# Altium PCB Current_measurement_PCB.PcbDoc
Units mm, origin at the board's own origin, x right, y up, seen from the top; angles counter-clockwise.
Board outline 33.27 x 21.72 mm, 2 copper layers (Top Layer, Bottom Layer); 15 components, 11 nets, 45 pads, 2 vias.
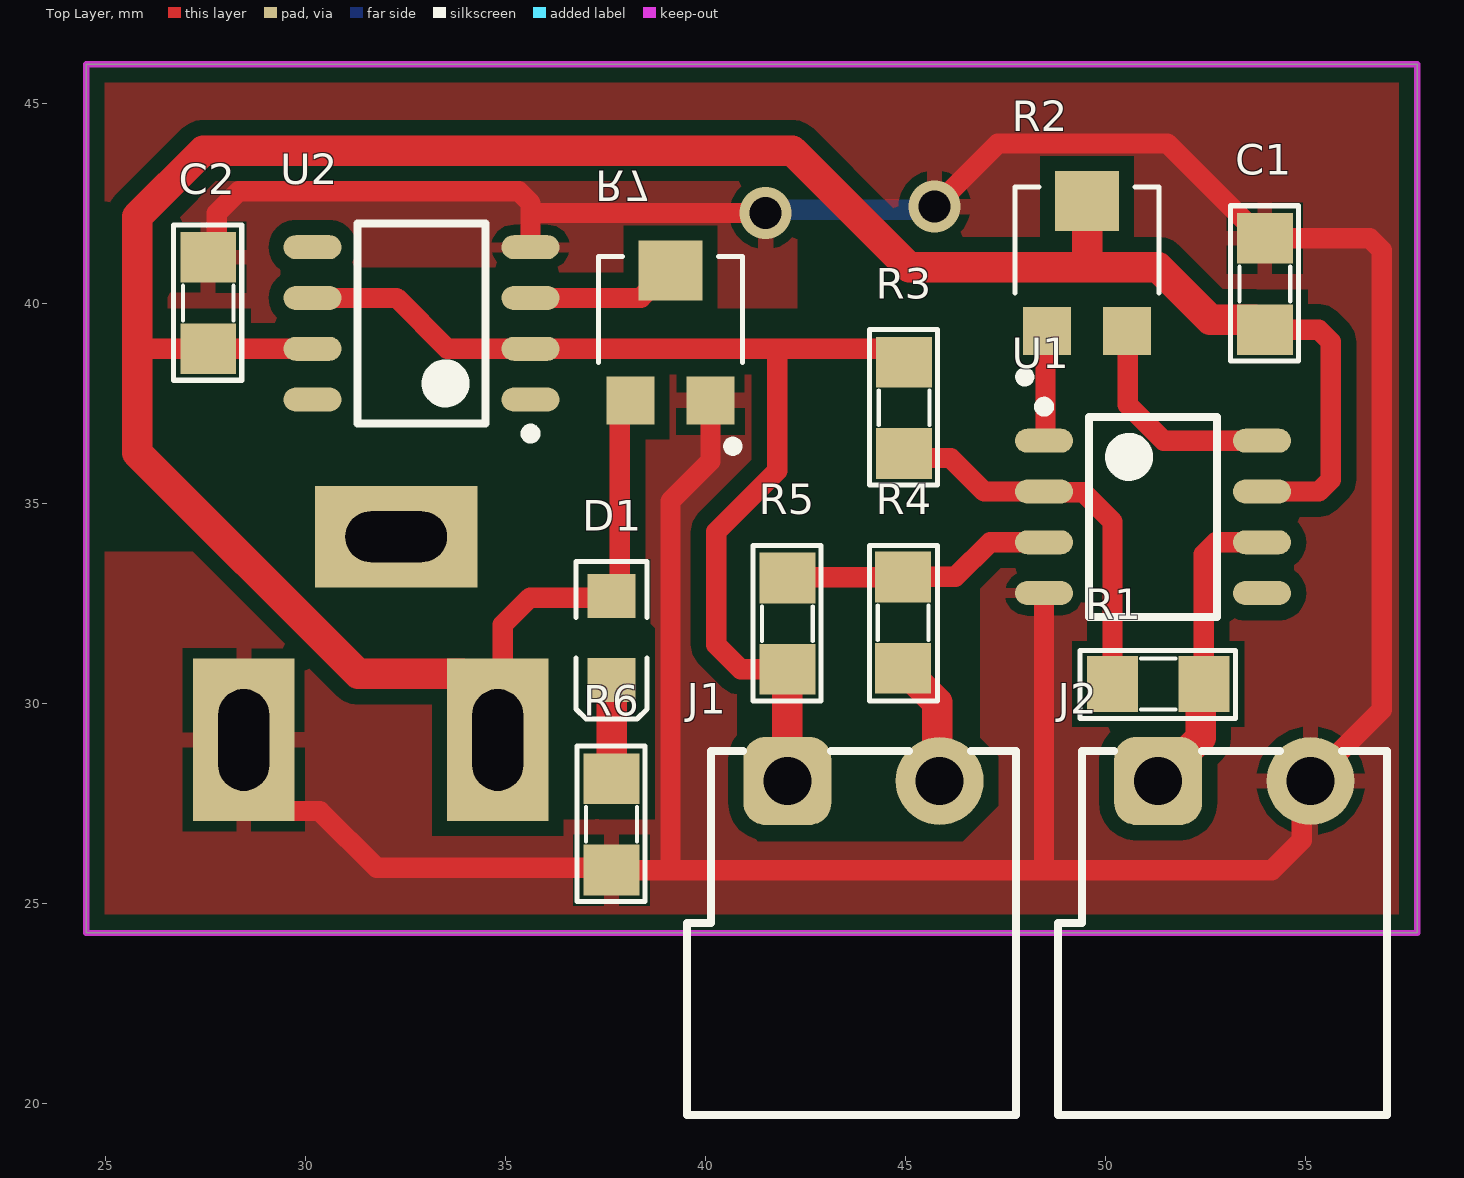
[diagram p0: Top Layer view]
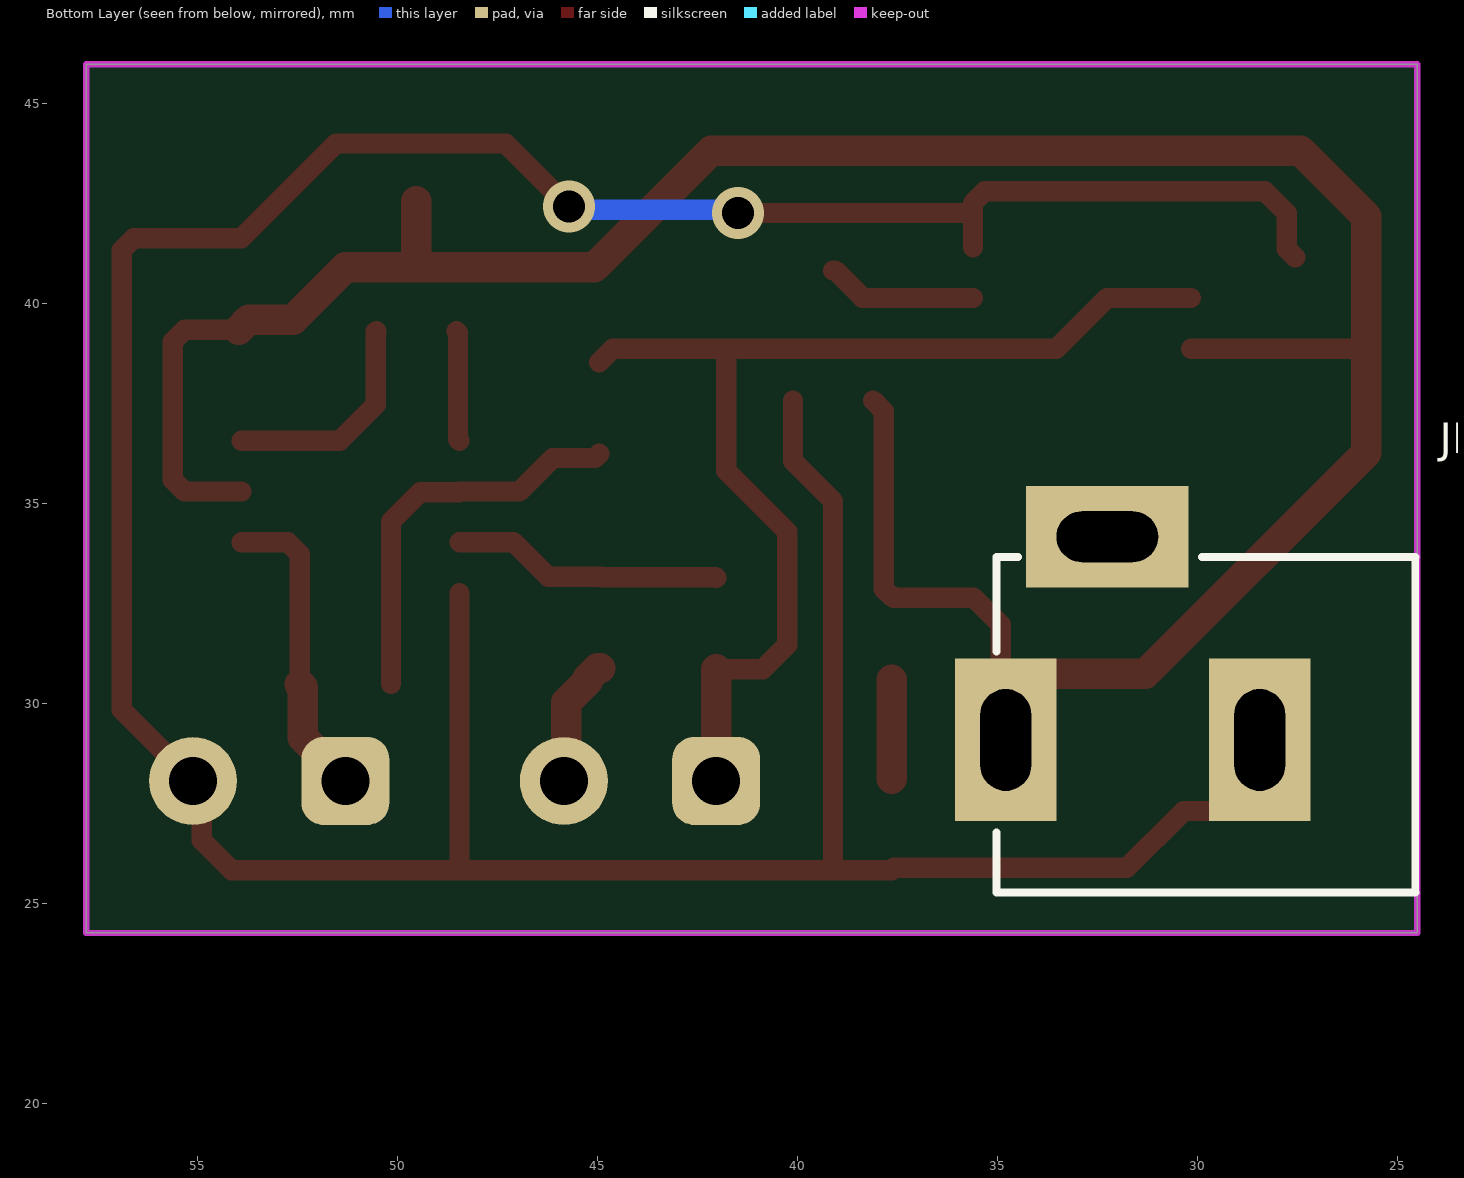
[diagram p1: Bottom Layer view, seen from below]
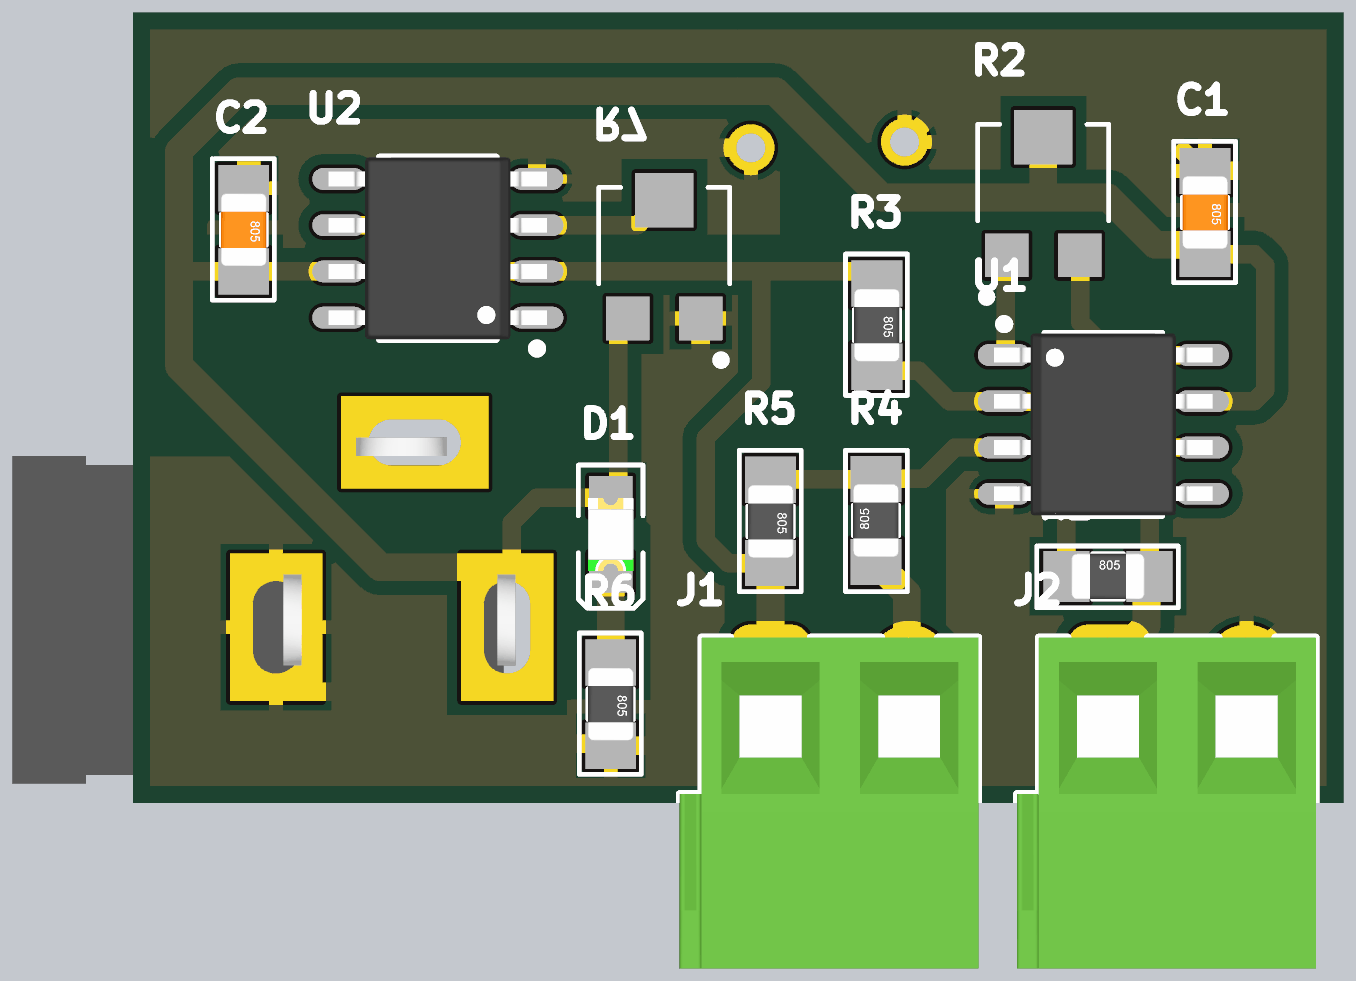
[diagram p2: 3D render of the assembled board from above, using the file's embedded part models]

## Layer stack, top to bottom
Top Solder: solder mask 0.0102, Solder Resist, Dk 3.5
Top Layer: signal copper 0.0356
Dielectric 1: dielectric 0.32, FR-4, Dk 4.8
Bottom Layer: signal copper 0.0356
Bottom Solder: solder mask 0.0102, Solder Resist, Dk 3.5

## Board outline
24.511,24.257 57.785,24.257 57.785,45.974 24.511,45.974

## Design rules (kind name [scope] priority, off if disabled: settings)
Clearance [All] p1: gap=0.381 ignorepadtopadclearanceinfootprint=FALSE
PolygonConnect PolygonConnect_3 [All vs IsNamedPolygon('NONET_L01_P001')] p1: connectstyle=Relief reliefconductorwidth=0.254 reliefentries=4 polygonreliefangle="90 Angle" airgapwidth=0.254
PolygonConnect PolygonConnect_2 [All vs IsNamedPolygon('NONET_L01_P001')] p2: thpad.connectstyle=Relief thpad.reliefconductorwidth=0.381 thpad.reliefentries=4 thpad.polygonreliefangle="90 Angle" thpad.airgapwidth=0.381 smdpad.connectstyle=Relief smdpad.reliefconductorwidth=0.254 smdpad.reliefentries=4 smdpad.polygonreliefangle="90 Angle" smdpad.airgapwidth=0.254 via.connectstyle=Relief via.reliefconductorwidth=0.254 via.reliefentries=4 via.polygonreliefangle="90 Angle" via.airgapwidth=0.254
PolygonConnect PolygonConnect_1 [All vs IsNamedPolygon('GND_L01_P000')] p3: thpad.connectstyle=Relief thpad.reliefconductorwidth=0.381 thpad.reliefentries=4 thpad.polygonreliefangle="90 Angle" thpad.airgapwidth=0.381 smdpad.connectstyle=Relief smdpad.reliefconductorwidth=0.254 smdpad.reliefentries=4 smdpad.polygonreliefangle="90 Angle" smdpad.airgapwidth=0.254 via.connectstyle=Relief via.reliefconductorwidth=0.254 via.reliefentries=4 via.polygonreliefangle="90 Angle" via.airgapwidth=0.254
PolygonConnect [All] p4: connectstyle=Relief reliefconductorwidth=0.254 reliefentries=4 polygonreliefangle="90 Angle" airgapwidth=0.254
RoutingVias [All] p1: holewidth=0.711 width=1.27 viastyle="Through Hole" minholewidth=0.711 minwidth=1.27 maxholewidth=0.711 maxwidth=1.27
SolderMaskExpansion [All] p1: expansion=0.102 istentingtop=FALSE
Width [All] p1: maxlimit=1.27 minlimit=0.508 preferedwidth=0.762 minimp=50.000000 maximp=50.000000 favimp=50.000000
30 further rules are at their usual default settings.

## Components (designator, comment, footprint, x,y, rotation, side; value= is the part's Value field where it differs from the comment)
C1 "Cap Non-Pol SMD" CAP-SM-0805 53.975,41.624 r270 top value=100nF
C2 "Cap Non-Pol SMD" CAP-SM-0805 27.559,41.148 r270 top value=100nF
D1 "LED SMD" LED_0805_Blue 37.643,31.636 r270 top
J1 "691214300002" 691214300002 43.942,24.257 r0 top
J2 "691214300002" 691214300002 53.213,24.257 r0 top
JDC1 "Jack DC" DC-IN 31.623,31.623 r0 bottom value="Jac DC"
R1 "RESISTOR SMD" RES-SM-0805 50.165,30.48 r0 top value=1K
R2 "TC33X-2-104E" TRIM_TC33X-2-104E#1 49.53,41.103 r90 top
R3 "RESISTOR SMD" RES-SM-0805 44.958,38.527 r270 top value=4K
R4 "RESISTOR SMD" RES-SM-0805 44.933,30.874 r90 top value=4K
R5 "RESISTOR SMD" RES-SM-0805 42.038,33.134 r270 top value=1K
R6 "RESISTOR SMD" RES-SM-0805 37.643,28.114 r270 top value=1K
R7 "TC33X-2-104E" TRIM_TC33X-2-104E#2 39.116,39.37 r90 top
U1 "OP07" SOIC8-OP07 51.181,34.658 r0 top
U2 "OP07" SOIC8-OP07 32.893,39.497 r180 top

## Footprints (in the part's own frame and the unit in brackets; to place one, negate y for a bottom-side part, rotate by r counter-clockwise, add the part's x,y. Pads: shape width x height; smd on the part's side, far side on the other; paste and mask are expansions set on the pad)
691214300002 [mm] "Serie 2143 - 3.81 mm _ 2 pins"
  rrect50% 2.2x2.2 hole 1.2: 1(-1.905,3.8)
  round 2.2 hole 1.2: 2(1.905,3.8)
  silkscreen extent -4.41,-4.55 3.81,4.55, body extent -4.41,-4.55 3.81,4.55, height 7.35
CAP-SM-0805 [mil]
  rect 50x55 smd: 1(0,0) 2(90,0)
  silkscreen extent -32,-34 121,33, body extent 6,-25 84,25, height 31
DC-IN [mil] "Jac DC input"
  rect 100x160 hole 50 slot 100 at 90 deg: 1(125,100) 2(-125,100)
  rect 160x100 hole 50 slot 100 at 0 deg: 3(25,-100)
  silkscreen extent -278,-80 134,250, body extent -410,-105 134,269, height 434
LED_0805_Blue [mm] "Chip LED, 2-Leads, Body 2.0x1.3mm, IPC Medium Density"
  rect 1.1x1.2 smd: 1(-1.05,0) 2(1.05,0)
  silkscreen extent -1.91,-0.89 2.03,0.89, body extent -1,-0.63 1,0.62, height 0.68
RES-SM-0805 [mil]
  rect 50x55 smd: 1(0,0) 2(90,0)
  silkscreen extent -32,-34 121,33, body extent 6,-25 84,25, height 31
SOIC8-OP07 [mm] "SOIC, 8-Leads, Body 4.91x3.91mm, Pitch 1.27mm, Thermal Pad 0.00x0.00mm, IPC Medium Density"
  oval 1.45x0.6 smd: 1(-2.725,1.905) 2(-2.725,0.635) 3(-2.725,-0.635) 4(-2.725,-1.905) 5(2.725,-1.905) 6(2.725,-0.635) 7(2.725,0.635) 8(2.725,1.905)
  silkscreen extent -2.85,-2.5 1.6,2.88, body extent -3,-2.5 3,2.5, height 1.75
TRIM_TC33X-2-104E#1 [mm]
  rect 1.2x1.2 smd: 1(-1.8,1) 3(-1.8,-1)
  rect 1.5x1.6 smd: 2(1.45,0)
  silkscreen extent -3.07,-1.8 1.8,1.8
TRIM_TC33X-2-104E#2 [mm]
  rect 1.2x1.2 smd: 1(-1.8,-1) 3(-1.8,1)
  rect 1.5x1.6 smd: 2(1.45,0)
  silkscreen extent -3.07,-1.8 1.8,1.8

## Part data
C1 C2: "Capacitor"
D1: "LED"
J1 J2: "WR-TBL Series 2143 Vertical Entry Modular, Through Hole, pitch 3.81mm, 2p", Manufacturer="Wurth Elektronik", Operating Temperature Max=120°C, Operating Temperature Min=-30°C, Rated Current=10A, Working Voltage=300V, Application="Rising Cage Clamp", Category="Terminal Blocks", ComponentLink1Description="Manufacturer Link", ComponentLink1URL=https://www.we-online.com/redexpert/article/691214300002?ad, ComponentLink2Description=Datasheet, ComponentLink2URL=https://www.we-online.com/redexpert/spec/691214300002?ad, Manufacturer Part Number=691214300002, Match Code=WR-TBL, Modularity=Yes, Mount="Through Hole", Orientation=Vertical, Packaging=Box, PCB/Cable/Panel=PCB, Pin Number=2, Pitch=3.81mm
JDC1: "Jack DC input"
R1 R3 R4 R5 R6: "Resistor"
R2 R7: "100 kOhms 0.1W, 1/10W J Lead Surface Mount Trimmer Potentiometer Cermet 1 Turn Top Adjustment", Package="SOD-23 Bourns", Availability=Unavailable, MF=Bourns, MP=TC33X-2-104E, Price=None, SnapEDA_Link=https://www.snapeda.com/parts/TC33X-2-104E/Bourns/view-part/50727/?ref=snap

## Via types
v1: diameter 1.3, hole 0.8, Top Layer to Bottom Layer, 2 vias

## Nets (pads, with @x,y where several pads share a name; then routed paths per layer and width w, separated by ;. In a path a pad name is that pad's centre, name@x,y a point inside that pad or via, vN(x,y) a via of type N, cw(c..) or ccw(c..) an arc to the next point about the centre after c; other vN are vias at no path point)
5V: C1.2 C2.2 D1.1 JDC1.1 R2.2 R7.3 U1.7 U2.7 | length 72.5
  Top Layer w0.508: 25.781,38.989 25.908,38.862 C2.2 U2.7 ; JDC1.1@34.925,29.845 34.925,31.96 35.604,32.639 37.596,32.639 D1.1 37.677,32.686 37.846,32.855 37.846,37.3 R7.3 ; U1.7 55.328,35.293 55.626,35.591 55.626,39.041 55.328,39.338 C1.2
  Top Layer w0.762: JDC1.1 34.798,29.845 33.909,30.734 31.307,30.734 25.781,36.26 25.781,38.989 25.781,42.164 27.432,43.815 42.164,43.815 45.085,40.894 49.403,40.894 ; R2.2 49.53,41.021 49.403,40.894 ; C1.2 53.721,39.592 52.61,39.592 51.308,40.894 49.403,40.894
GND: C1.1 C2.1 J2.2 JDC1.2 R6.2 R7.1 U1.4 U2.4 | length 96.8
  Top Layer w0.508: C2.1 27.769,41.358 27.769,42.247 28.321,42.799 35.32,42.799 35.618,42.501 U2.4 ; JDC1.2 28.448,28.321 29.464,27.305 30.353,27.305 31.772,25.886 37.585,25.886 R6.2 39.116,25.828 ; 35.618,42.256 v1(41.494,42.256) ; R7.1 40.116,36.052 39.116,35.052 39.116,25.828 ; v1(45.72,42.418) 47.295,43.993 51.543,43.993 53.911,41.624 C1.1 56.598,41.624 56.896,41.327 56.896,29.835 54.899,27.838 54.899,26.578 54.149,25.828 48.514,25.828 ; U1.4 48.456,25.886 48.514,25.828 ; 39.116,25.828 48.514,25.828
  Bottom Layer w0.508: v1(41.494,42.256) 41.575,42.337 45.639,42.337 v1(45.72,42.418)
NetD1_2: D1.2 R6.1 | length 2.5
  Top Layer w0.762: R6.1 D1.2
NetJ1_2: J1.2 R4.1 | length 3.2
  Top Layer w0.762: R4.1 44.996,30.874 45.25,30.62 45.25,30.556 45.781,30.025 45.781,28.123 J1.2
NetR1_1: R1.1 R3.2 U1.2 | length 10
  Top Layer w0.508: R3.2 45.068,36.131 46.121,36.131 46.958,35.293 U1.2 48.474,35.276 49.433,35.276 50.165,34.544 R1.1
NetR2_1: R2.1 U1.1 | length 2.8
  Top Layer w0.508: U1.1 48.493,36.6 48.493,39.266 R2.1
NetR2_3: R2.3 U1.8 | length 5.6
  Top Layer w0.508: R2.3 50.546,39.287 50.546,37.465 51.448,36.563 U1.8
NetR4_2: R4.2 R5.1 U1.3 | length 6.8
  Top Layer w0.508: R5.1 42.05,33.147 44.92,33.147 R4.2 46.241,33.16 47.104,34.023 U1.3
NetR7_2: R7.2 U2.3 | length 3.8
  Top Layer w0.508: U2.3 38.378,40.132 39.066,40.82 R7.2
VOUT: J2.1 R1.2 U1.6 | length 7.7
  Top Layer w0.508: R1.2 52.451,33.726 52.749,34.023 U1.6
  Top Layer w0.762: J2.1 51.308,28.074 52.37,29.136 52.37,30.399 R1.2
VREF: J1.1 R3.1 R5.2 U2.2 U2.6 | length 28.3
  Top Layer w0.508: U2.6 32.267,40.132 33.537,38.862 U2.2 41.783,38.862 ; R5.2 40.873,30.848 40.259,31.462 40.259,34.29 41.783,35.814 41.783,38.862 ; R3.1 44.623,38.862 41.783,38.862
  Top Layer w0.762: J1.1 R5.2
pads on no net: JDC1.3 U1.5 U2.1 U2.5 U2.8

## Polygon pours and split planes (outlines as drawn)
GND on Top Layer "GND_L01_P000" (solid, remove dead copper, pour order 0): 24.511,24.257 57.785,24.257 57.785,45.974 24.511,45.974

## Keep-outs
Keep-Out Layer:
  the board outline again, w0.152

## Other copper
Top Layer:
  pour cut-out: 34.677,39.509 34.943,39.775 34.943,40.903 31.069,40.903 32.463,39.509
  pour cut-out: 24.768,36.195 25.143,36.195 27.556,33.782 24.768,33.782
  pour cut-out: 35.941,32.038 38.574,32.038 38.731,31.881 38.731,27.085 37.278,27.098 35.941,27.086
  pour cut-out: 42.291,39.509 42.279,39.497 38.481,39.497 38.481,39.751 38.608,39.878 42.291,39.878 42.291,42.672 44.612,40.351 48.006,40.351 48.006,36.703 46.863,35.56 46.863,29.135 47.328,28.67 47.328,27.444 46.427,26.543 41.301,26.543 40.767,27.077 40.767,35.56 42.291,37.084